# Altium PCB MAGI'sBatteryPowerMega.PcbDoc (part 1 of 2)
Units mil, origin at the board's own origin, x right, y up, seen from the top; angles counter-clockwise.
Board outline 6000 x 4000 mil, 2 copper layers (Top Layer, Bottom Layer); 34 components, 41 nets, 189 pads, 153 vias.
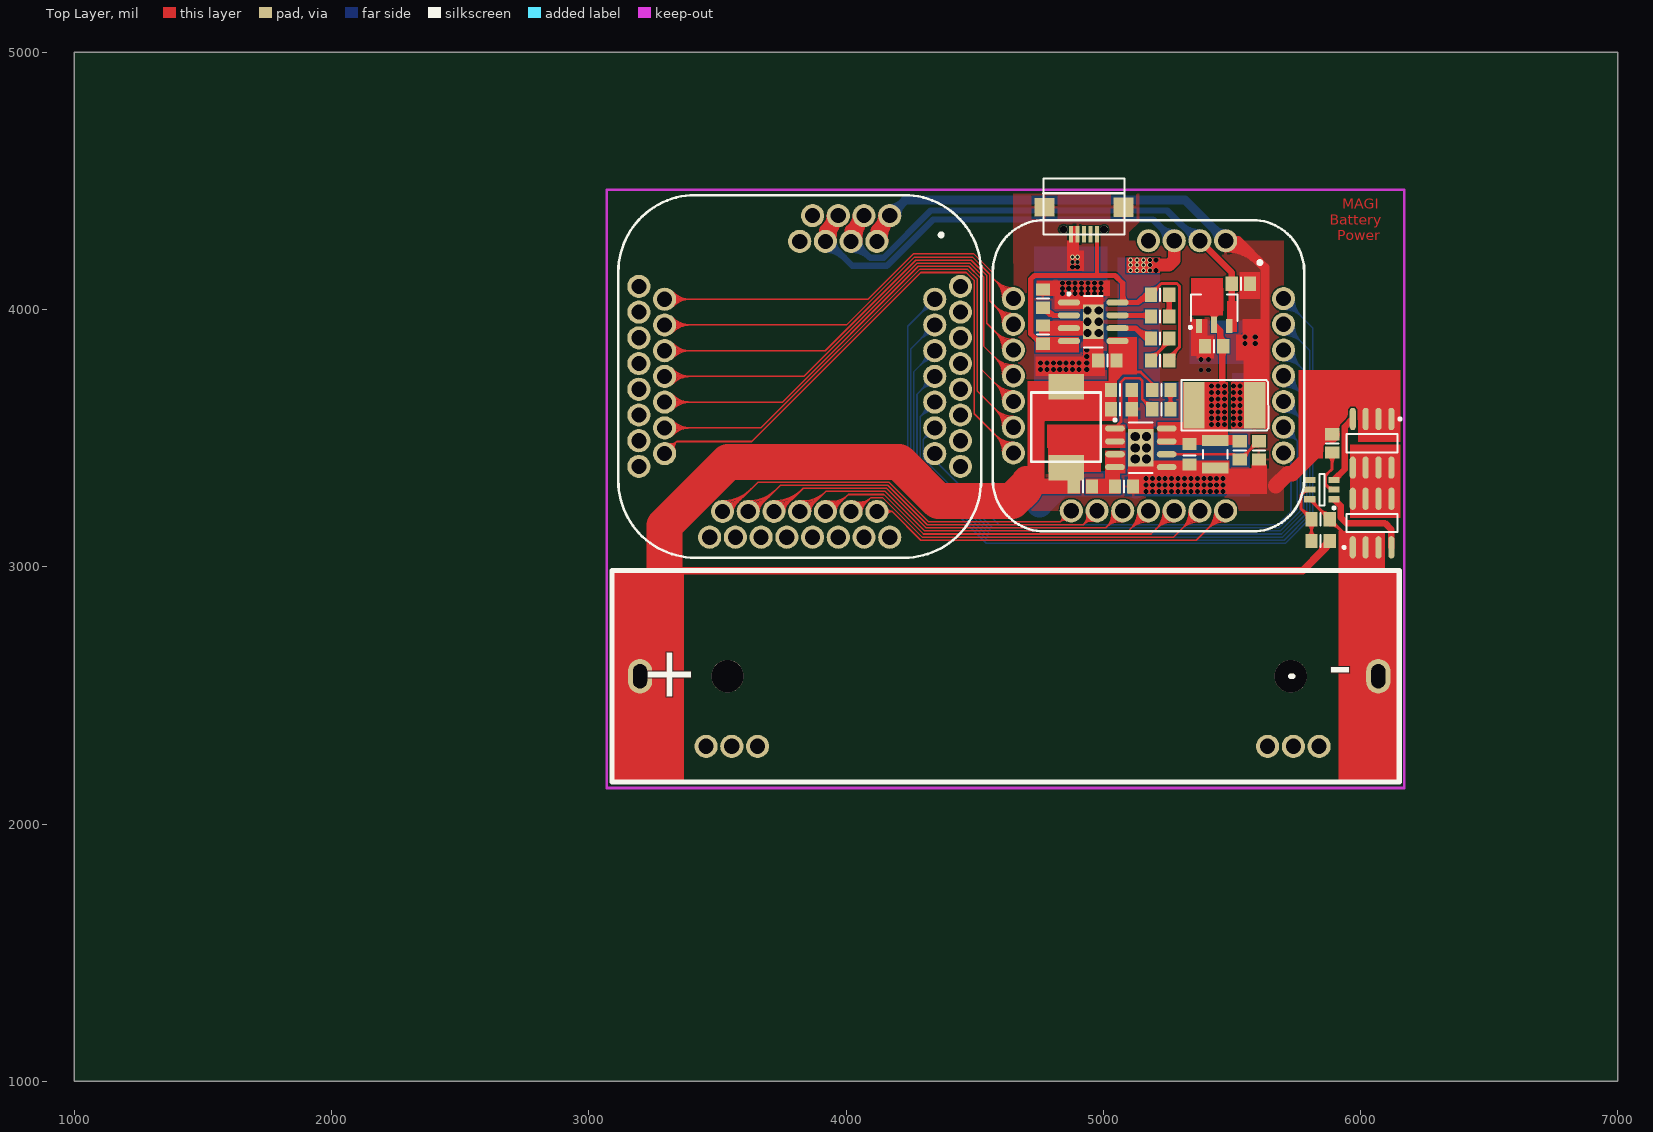
[diagram p0: Top Layer view]
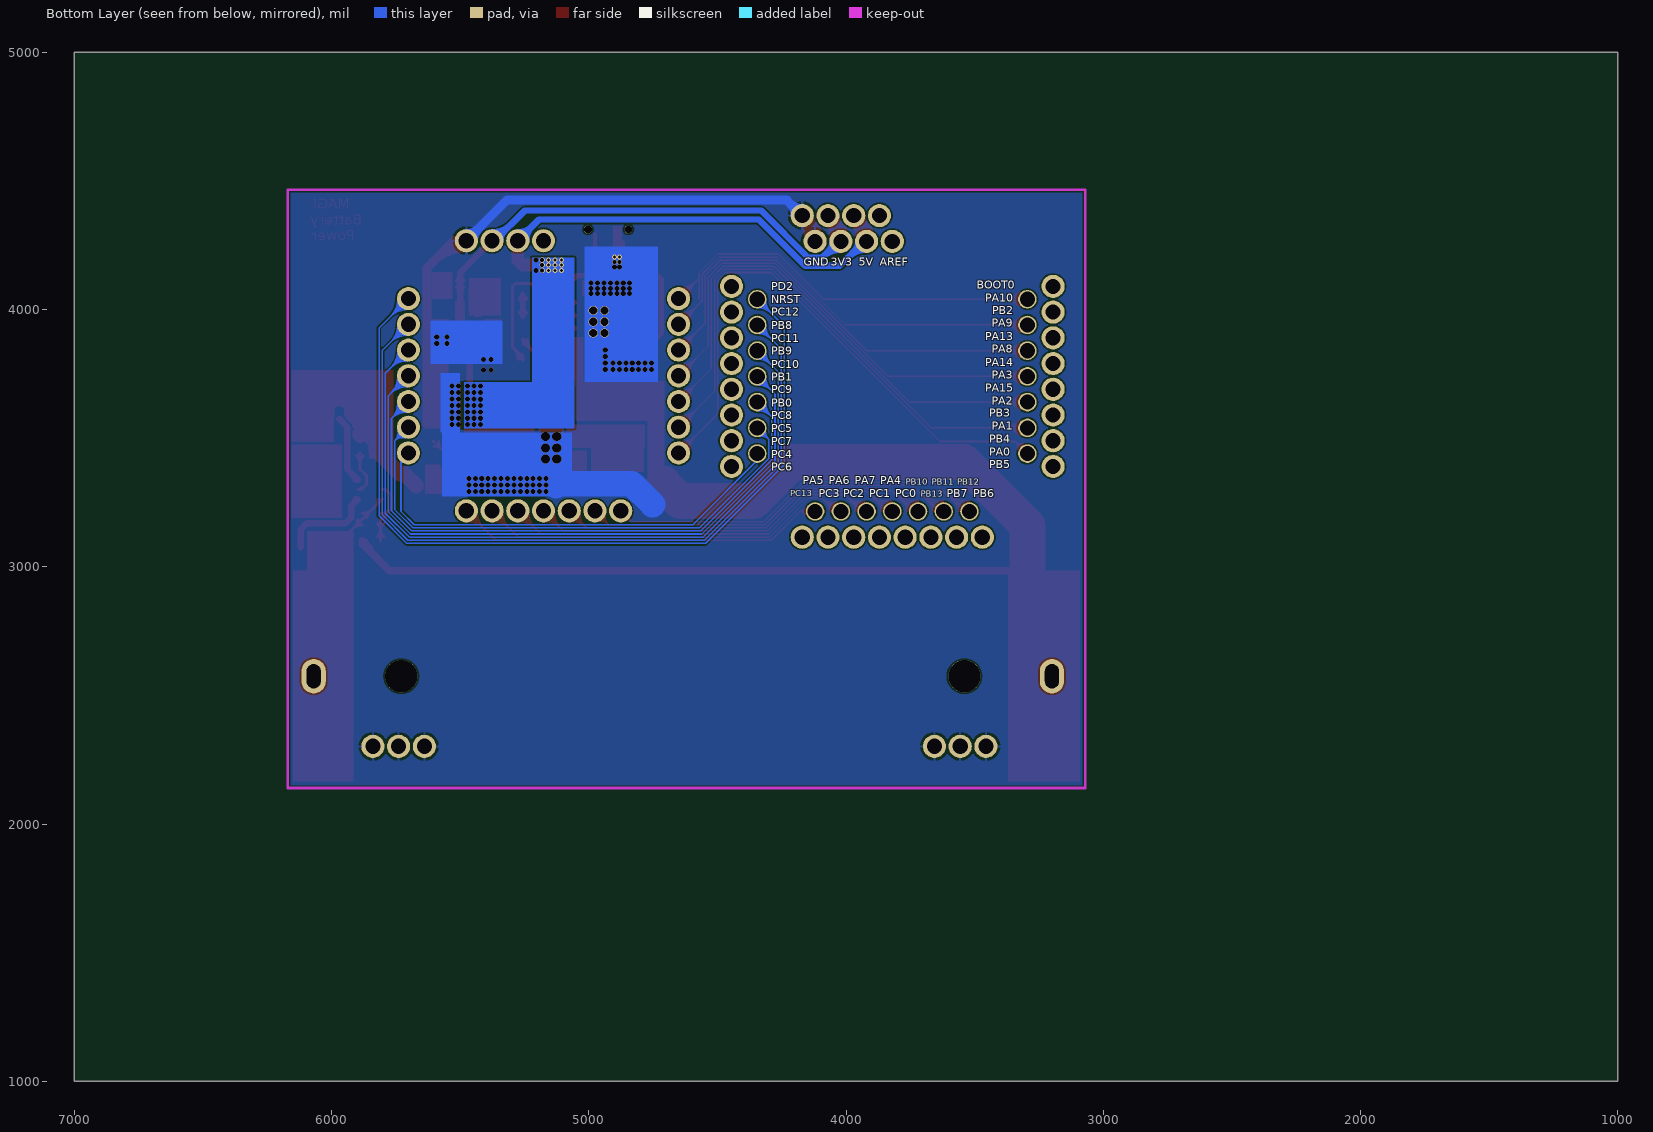
[diagram p1: Bottom Layer view, seen from below]

## Layer stack, top to bottom
Top Solder: solder mask 0.4, Solder Resist, Dk 3.5
Top Layer: signal copper 1.4
Dielectric1: dielectric 12.6, FR-4, Dk 4.8
Bottom Layer: signal copper 1.4
Bottom Solder: solder mask 0.4, Solder Resist, Dk 3.5

## Board outline
1000,1000 7000,1000 7000,5000 1000,5000

## Design rules (kind name [scope] priority, off if disabled: settings)
Clearance [All] p1: gap=6
PolygonConnect [All] p1: connectstyle=Relief reliefconductorwidth=10 reliefentries=4 polygonreliefangle="90 Angle" airgapwidth=10
RoutingVias [All] p1: holewidth=28 width=50 viastyle="Through Hole" minholewidth=28 minwidth=50 maxholewidth=28 maxwidth=50
SolderMaskExpansion [All] p1: expansion=4
Width [All] p1: maxlimit=200 minlimit=6 preferedwidth=30
29 further rules are at their usual default settings.

## Components (designator, comment, footprint, x,y, rotation, side; value= is the part's Value field where it differs from the comment)
C1 "TAN Cap" TAN-D-7343 5470.94,3627.44 r0 top
C2 "22uf" 14-1210 5435.94,3437.44 r270 top
C4 "10uf" 6-0805_N#1 5335.94,3432.44 r270 top
C5 "10uf" 6-0805_N#2 5430.94,3857.44 r180 top
C6 "10uf" 6-0805_N#2 5535,4100 r0 top
C7 "10uf" 6-0805_N#3 5065.94,3612.44 r0 top
C8 "1uf" 6-0805_N#2 5080.94,3312.44 r0 top
C9 "10uf" 6-0805_N#3 5065.94,3687.44 r0 top
C10 "10uf" 6-0805_N#2 4765.94,3902.44 r90 top
C11 "10uf" 6-0805_N#2 5015.94,3802.44 r180 top
C12 "10uf" 6-0805_N#2 5845,3185 r0 top
D1 "LED" 6-0805_N#2 5225.94,3687.44 r0 top
D2 "LED" 6-0805_N#2 5220.94,3972.44 r180 top
D3 "LED" 6-0805_N#2 5220.94,3887.44 r180 top
J1 "MAGI-M8" MAGI-M8 5175.94,3742.44 r0 top
J2 "CON2" 18650 5195,2565 r180 top
J3 "MAGIsBoard-2x" MAGIsBoard-2x 3820,3740 r0 top
L1 "INDUCTOR" 7*7 4845.94,3542.44 r90 top
Q1 "IRF7822" SO-8_N 6045,3170 r90 top
Q2 "IRF7822" SO-8_N 6045,3480 r270 top
R4 "1K" 6-0805_N#2 5225.94,3612.44 r180 top
R5 "316kΩ" 6-0805_N#2 5530.94,3452.44 r270 top
R6 "4.7" 6-0805_N#2 4920.94,3312.44 r0 top
R7 "100kΩ" 6-0805_N#2 5605.94,3452.44 r270 top
R8 "RPROG" 6-0805_N#2 4765.94,4042.44 r270 top
R9 "1K" 6-0805_N#2 5220.94,4057.44 r180 top
R10 "1K" 6-0805_N#2 5220.94,3802.44 r0 top
R12 "000" 6-0805_n 5890,3480 r270 top
R13 "000" 6-0805_n 5845,3100 r0 top
U1 "USB" MicroUSB 4925,4315 r0 top
U2 "HS7333" HS7333 5430.94,4007.44 r90 top
U3 "G5177B" G5177B 5145.94,3462.44 r0 top
U4 "TP4056" TP4056 4960.94,3952.44 r0 top
U6 "DW-01" TPS2513 5850,3300 r180 top

## Footprints (in the part's own frame and the unit in brackets; to place one, negate y for a bottom-side part, rotate by r counter-clockwise, add the part's x,y. Pads: shape width x height; smd on the part's side, far side on the other; paste and mask are expansions set on the pad)
6-0805_N#1 [mm] "Chip Resistor, Body 2.0x1.2mm, IPC Medium Density"
  rect 1.2x1.4 smd: 1(-1.143,0) 2(0.9,0)
  silkscreen extent 0,-0.6 0,0.6, body extent -1.07,-0.7 1.07,0.7, height 0.7
6-0805_N#2 [mm] "Chip Resistor, Body 2.0x1.2mm, IPC Medium Density"
  rect 1.2x1.4 smd: 1(-0.9,0) 2(0.9,0)
  silkscreen extent 0,-0.6 0,0.6, body extent -1.07,-0.7 1.07,0.7, height 0.7
6-0805_N#3 [mm] "Chip Resistor, Body 2.0x1.2mm, IPC Medium Density"
  rect 1.2x1.4 smd: 1(-0.9,0) 2(1.143,0)
  silkscreen extent 0,-0.6 0,0.6, body extent -1.07,-0.7 1.07,0.7, height 0.7
6-0805_n [mm] "Chip Resistor, Body 2.0x1.2mm, IPC Medium Density"
  rect 1.2x1.4 smd: 1(-0.9,0) 2(0.9,0)
  silkscreen extent 0,-0.6 0,0.6, body extent -1.07,-0.7 1.07,0.7, height 0.7
7*7 [mil]
  rect 98.43x137.8 smd: 1(-157.5,-10) 2(157.5,-10)
  silkscreen extent -135,-145 135,125
14-1210 [mm] "Chip Resistor, Body 3.2x2.5mm, IPC High Density"
  rect 1.1x2.6 smd: 1(-1.35,0) 2(1.35,0)
  silkscreen extent -0.4,-1.2 0.4,1.2, body extent -1.68,-1.32 1.68,1.32, height 0.9
18650 [mm]
  round 3.2 hole 3.2: 0(-13.56,-0.24) 0(42.05,-0.24)
  oval 2.4x3.4 hole 1.38 slot 2.4 at 90 deg: 1(50.69,-0.24) 2(-22.21,-0.24)
  silkscreen extent -24.28,-10.69 53.46,10.21
G5177B [mm]
  oval 1.95x0.6 smd: 1(-2.55,1.905) 2(-2.55,0.635) 3(-2.55,-0.635) 4(-2.55,-1.905) 5(2.55,-1.905) 6(2.55,-0.635) 7(2.55,0.635) 8(2.55,1.905)
  rect 2.55x3.71 smd: 9(0,0)
  silkscreen extent -2.67,-2.5 1.17,2.88, body extent -2,-2.5 2,2.5, height 1.65
HS7333 [mm] "SOT89, 3-Leads, Body 4.50x2.50mm, Pitch 1.50mm, Lead Span 4.1mm, IPC Medium Density"
  rect 1.4x0.6 smd: 1(-1.8,1.5) 3(-1.8,-1.5)
  rect 1.6x0.6 smd: 2(-1.7,0)
  Top Layer region: -0.9,0.3 -0.3,0.9 1.9,0.9 2.5,0.3 2.5,-0.3 1.9,-0.9 -0.3,-0.9 -0.9,-0.3
  silkscreen extent -2.07,-2.3 1.3,2.47, body extent -1.3,-2.3 1.3,2.3, height 1.6
MAGI-M8 [mil]
  round 90 hole 59.06: 1(300,525) 2(200,525) 3(100,525) 4(0,525) 8(-525,300) 9(-525,200) 10(-525,100) 11(-525,0) 12(-525,-100) 13(-525,-200) 14(-525,-300) 15(-300,-525) 16(-200,-525) 17(-100,-525) 18(0,-525) 19(100,-525) 20(200,-525) 21(300,-525) 22(525,-300) 23(525,-200) 24(525,-100) 25(525,0) 26(525,100) 27(525,200) 28(525,300)
  silkscreen extent -605,-605 605,430
MAGIsBoard-2x [mil]
  round 90 hole 59.06: 1(300,525) 1(350,625) 2(200,525) 2(250,625) 3(100,525) 3(150,625) 4(0,525) 4(50,625) 29(-625,350) 30(-625,250) 31(-625,150) 32(-625,50) 33(-625,-50) 34(-625,-150) 35(-625,-250) 36(-625,-350) 37(-350,-625) 38(-250,-625) 39(-150,-625) 40(-50,-625) 41(50,-625) 42(150,-625) 43(250,-625) 44(350,-625) 45(625,-350) 46(625,-250) 47(625,-150) 48(625,-50) 49(625,50) 50(625,150) 51(625,250) 52(625,350)
  round 90 / inner round 72 / far side round 72 hole 59.06: 8(-525,300) 9(-525,200) 10(-525,100) 11(-525,0) 12(-525,-100) 13(-525,-200) 14(-525,-300) 15(-300,-525) 16(-200,-525) 17(-100,-525) 18(0,-525) 19(100,-525) 20(200,-525) 21(300,-525) 22(525,-300) 23(525,-200) 24(525,-100) 25(525,0) 26(525,100) 27(525,200) 28(525,300)
  silkscreen extent -705,-705 705,705
MicroUSB [mm]
  round 0.8 hole 0.8: 0(-2,-0.1) 0(2,-0.1)
  rect 0.4x1.6 smd: 1(1.3,-0.576) 2(0.65,-0.576) 3(0,-0.576) 4(-0.65,-0.576) 5(-1.3,-0.576)
  rect 2x1.8 smd: 6(-3.9,2.1)
  rect 2x1.9 smd: 7(3.9,2.1)
  silkscreen extent -4,-0.58 4,4.92, body extent -4.1,-0.68 4.1,5.02, height 3
SO-8_N [mm] "SOIC, 8-Leads, Body 4.9x3.9mm, Pitch 1.27mm, IPC Medium Density"
  oval 2.2x0.6 smd: 1(-2.4,1.905) 2(-2.4,0.635) 3(-2.4,-0.635) 4(-2.4,-1.905) 5(2.4,-1.905) 6(2.4,-0.635) 7(2.4,0.635) 8(2.4,1.905)
  silkscreen extent -2.52,-2.5 0.9,2.88, body extent -2,-2.5 2,2.5, height 1.75
TAN-D-7343 [mm]
  rect 2.1x4.6 smd: 1(-3,0) 2(3,0)
  silkscreen extent -4.25,-2.5 4.34,2.5, body extent -3.65,-2.15 3.65,2.15, height 2.9
TP4056 [mm] "SOIC, 8-Leads, Body 4.90x3.90mm, Pitch 1.27mm, Thermal Pad 3.40.2x2.00.2mm, IPC Medium Density"
  oval 2.2x0.6 smd: 1(-2.4,1.905) 2(-2.4,0.635) 3(-2.4,-0.635) 4(-2.4,-1.905) 5(2.4,-1.905) 6(2.4,-0.635) 7(2.4,0.635) 8(2.4,1.905)
  rect 2x3.4 smd: 9(0,0)
  silkscreen extent -2.52,-2.55 0.9,2.88, body extent -2,-2.55 2,2.55, height 1.75
TPS2513 [mm]
  rect 1.1x0.6 smd: 1(-1.2,0.95) 2(-1.2,0) 3(-1.2,-0.95) 4(1.2,-0.95) 5(1.2,0) 6(1.2,0.95)
  silkscreen extent -1.33,-1.55 0.25,1.92, body extent -0.87,-1.52 0.87,1.53, height 1.45

## Part data
C1 C2 C4 C5 C6 C7 C8 C9 C10 C11 C12: library part "CAPACITOR POL", "Capacitor"
J2: "Connector"
Q1 Q2: "HEXFET Power MOSFET"
R4 R5 R6 R7 R8 R9 R10 R12 R13: library part RES1
U6: library part TPS2513

## Free pads (board coordinates)
  round 90 hole 59.06: 1(3456.1,2301.9) 2(3456.1,2301.9) 2(5639.06,2301.9) 3(3556.1,2301.9) 3(5739.06,2301.9) 4(3656.1,2301.9) 4(5839.06,2301.9)

## Via types
v1: diameter 19.68, hole 19.68, Top Layer to Bottom Layer, 125 vias
v2: diameter 19.68, hole 11.81, Top Layer to Bottom Layer, 11 vias
v3: diameter 35.43, hole 31.5, Top Layer to Bottom Layer, 6 vias
v4: diameter 35.43, hole 35.43, Top Layer to Bottom Layer, 6 vias
v5: diameter 19.68, hole 15.75, Top Layer to Bottom Layer, 5 vias

## Nets (pads, with @x,y where several pads share a name; then routed paths per layer and width w, separated by ;. In a path a pad name is that pad's centre, name@x,y a point inside that pad or via, vN(x,y) a via of type N, cw(c..) or ccw(c..) an arc to the next point about the centre after c; other vN are vias at no path point)
3.3V: C6.1 J1.2 J3.2 U2.3 | length 2482.6
  Top Layer w25: J1.2@5375.94,4267.44 5499.57,4143.82 C6.1@5499.57,4100 5499.57,4000.43 5505,3995 ; C6.1@5491.7,4088.2 cw(c5472.72,4069.21) 5499.57,4069.21 cw(c5526.42,4069.21) C6.1@5507.43,4088.2 ; C6.1@5491.7,4111.8 ccw(c5472.72,4130.79) 5499.57,4130.79 ccw(c5526.42,4130.79) C6.1@5507.43,4111.8
  Top Layer w50: J3.2@4020,4265 4020,4307.52 J3.2@4070,4357.52 ; 4030.57,4318.09 ccw(c3983.66,4365) J3.2@4050,4365 ; J3.2@4039.81,4267.73 cw(c4145.27,4282.25) J3.2@4070,4357.52 ; 4044.58,4313.5 ccw(c3991.71,4344.02) J3.2@4050.68,4359.82 ; J3.2@4070,4365 J3.2@4070,4357.52
  Bottom Layer w25: J3.2@4020,4232.5 cw(c4020,4129.42) 4092.89,4202.31 ; J3.2@4020,4265 4030.2,4265 4093.7,4201.5 4146.3,4201.5 4329.8,4385 5248.19,4385 5365.75,4267.44 J1.2@5375.94,4267.44 ; J3.2@4052.5,4265 ccw(c4106.34,4265) 4068.27,4226.93 ; 5303.06,4330.13 ccw(c5375.94,4403.02) J1.2@5375.94,4299.94 ; 5327.67,4305.51 cw(c5289.6,4267.44) J1.2@5343.44,4267.44
5V: C1.1 C2.1 C4.1 C5.1 J1.3 J3.3 R5.1 U2.2 U3.7 U3.8 | length 3837.2
  Top Layer w12: v1@5419.02,3654.58 ccw(c5408.05,3673.59) 5429.25,3667.91 ; 5420.94,3637.44 5420.94,3665.07 ; v1@5424.27,3675.52 cw(c5443.28,3664.55) 5437.6,3685.75 ; v1@5428.45,3671.1 ccw(c5425.24,3692.81) v1@5442.86,3679.73 ; 5430.95,3666.42 ccw(c5421.74,3686.35) v1@5442.34,3678.77 ; 5435.16,3687.27 cw(c5455.23,3678.38) v1@5447.33,3698.86 ; 5437.64,3685.79 cw(c5458.84,3680.11) v1@5447.87,3699.11 ; v1@5437.88,3678.65 cw(c5450.24,3676.8) 5443.99,3687.62 ; v1@5440.05,3684.93 ccw(c5433.43,3694.02) v1@5442.76,3700.3 ; 5442.83,3686.95 cw(c5470.94,3658.84) v1@5470.94,3698.6 ; v1@5449.74,3676.87 cw(c5481.71,3672.08) v1@5465.55,3700.07 ; v1@5449.77,3677.76 cw(c5481.89,3680.44) 5459.1,3703.23 5420.94,3665.07 ; 5450.12,3692.26 ccw(c5443.77,3700.98) v1@5452.71,3706.99 ; 5420.95,3665.07 cw(c5442.08,3643.94) 5445.5,3673.62 ccw(c5442.08,3643.94) 5420.95,3665.07 ; v1@5420.94,3681.28 ccw(c5420.94,3720.43) 5448.63,3692.75 cw(c5420.94,3720.43) v1@5420.94,3681.28 ; v1@5420.94,3681.28 ccw(c5420.94,3697.56) 5432.45,3686.05 cw(c5420.94,3697.56) v1@5420.94,3681.28 ; v1@5424.79,3651.25 cw(c5467.41,3651.25) 5437.27,3681.4 ccw(c5467.41,3651.25) v1@5424.79,3651.25 ; v1@5424.79,3651.25 cw(c5443.08,3651.25) 5430.14,3664.19 ccw(c5443.08,3651.25) v1@5424.79,3651.25 ; v1@5412.79,3651.25 cw(c5426.44,3651.25) 5416.79,3660.91 ccw(c5426.44,3651.25) v1@5412.79,3651.25 ; v1@5416.88,3670.37 ccw(c5422.48,3680.12) 5431.6,3673.54 cw(c5422.48,3680.12) v1@5416.88,3670.37 ; v1@5420.35,3681.24 ccw(c5415.29,3713.51) 5443.58,3697.17 cw(c5415.29,3713.51) v1@5420.35,3681.24 ; v1@5422.21,3669.38 ccw(c5420.29,3681.63) 5431.02,3675.43 cw(c5420.29,3681.63) v1@5422.21,3669.38 ; v1@5422.86,3680.77 ccw(c5429.15,3691.73) 5439.39,3684.33 cw(c5429.15,3691.73) v1@5422.86,3680.77 ; v1@5423.5,3657.54 cw(c5452.24,3640.95) 5446.6,3673.65 ccw(c5452.24,3640.95) v1@5423.5,3657.54 ; v1@5426.21,3679.81 ccw(c5409.88,3708.1) 5442.15,3703.04 cw(c5409.88,3708.1) v1@5426.21,3679.81 ; v1@5428.63,3672.02 cw(c5437.31,3665.65) 5443.68,3674.34 ccw(c5437.31,3665.65) v1@5428.63,3672.02 ; 5430.64,3674.76 ccw(c5402.96,3702.44) 5442.1,3702.44 cw(c5402.96,3702.44) 5430.64,3674.76 ; 5435.72,3681.7 cw(c5444.4,3675.34) 5450.76,3684.02 ccw(c5444.4,3675.34) 5435.72,3681.7 ; 5436.31,3679.73 cw(c5446.57,3673.8) 5444.56,3685.48 ccw(c5446.57,3673.8) 5436.31,3679.73 ; v1@5439.36,3672.62 cw(c5448.05,3678.98) 5441.69,3687.66 ccw(c5448.05,3678.98) v1@5439.36,3672.62 ; 5447.96,3692.36 ccw(c5441.76,3703.1) 5454,3701.18 cw(c5441.76,3703.1) 5447.96,3692.36 ; v1@5449.05,3679.71 cw(c5457.73,3686.07) 5451.37,3694.76 ccw(c5457.73,3686.07) v1@5449.05,3679.71
  Top Layer w25: U2.2@5430.94,3940.51 5455.69,3915.77 5455.69,3889.01 ; v1@5445.63,3705.08 cw(c5448.2,3683.76) v1@5463.39,3698.94 ; v1@5445.79,3705.09 cw(c5447.16,3680.91) 5464.29,3698.04 v1@5463.39,3698.94 ; 5463.39,3714.27 ccw(c5482.78,3714.27) v1@5469.07,3700.56 ; 5455.69,3889.01 ccw(c5472.97,3889.01) 5468.96,3872.2 cw(c5472.97,3889.01) 5455.69,3889.01 ; 5455.69,3889.01 cw(c5444.15,3877.47) 5457.37,3867.9 ccw(c5444.15,3877.47) 5455.69,3889.01 ; 5455.69,3889.01 5466.38,3878.32 C5.1@5466.38,3857.44 5463.39,3854.45 v1@5463.39,3698.94 ; 5463.39,3819.43 cw(c5500.45,3819.43) 5474.24,3845.64 ccw(c5500.45,3819.43) 5463.39,3819.43 ; v1@5465.62,3696.71 cw(c5446.35,3677.44) 5473.6,3677.44 ccw(c5446.35,3677.44) v1@5465.62,3696.71
  Top Layer w50: J3.3@3920,4265 3920,4307.52 J3.3@3970,4357.52 ; 3930.57,4318.09 ccw(c3883.66,4365) J3.3@3950,4365 ; J3.3@3939.81,4267.73 cw(c4045.27,4282.25) J3.3@3970,4357.52 ; 3944.58,4313.5 ccw(c3891.71,4344.02) J3.3@3950.68,4359.82 ; J3.3@3970,4365 J3.3@3970,4357.52 ; v5(5180.94,4172.44) 5255.94,4172.44 5275.94,4192.44 J1.3@5275.94,4267.44
  Bottom Layer w25: J3.3@3920,4232.5 cw(c3920,4129.42) 3992.89,4202.31 ; J3.3@3920,4265 3930.2,4265 4024.7,4170.5 4159.14,4170.5 4338.64,4350 5193.39,4350 J1.3@5275.94,4267.44 ; J3.3@3952.5,4265 ccw(c4006.34,4265) 3968.27,4226.93 ; J1.3@5243.44,4267.44 ccw(c5164.98,4267.44) 5220.46,4322.92 ccw(c5275.94,4378.4) J1.3@5275.94,4299.94
  other v1: 5420.94,3552.44 5445.94,3552.44 5470.94,3552.44 5420.94,3577.44 5445.94,3577.44 5470.94,3577.44 5420.94,3602.44 5445.94,3602.44 5470.94,3602.44 5420.94,3627.44 5445.94,3627.44 5470.94,3627.44 5420.94,3651.25 5445.94,3652.44 5470.94,3652.44 5420.94,3677.44 5445.94,3677.44 5470.94,3677.44 5420.94,3702.44 5445.94,3702.44 5470.94,3702.44 5205.94,4152.44 5205.94,4192.44
  other v2: 5105.94,4152.44 5130.94,4152.44 5155.94,4152.44 5105.94,4172.44 5130.94,4172.44 5155.94,4172.44 5105.94,4192.44 5130.94,4192.44 5155.94,4192.44
  other v5: 5180.94,4152.44 5180.94,4192.44
A0: J1.22 J3.22 | length 1775.8
  Bottom Layer w6: J3.22@4345,3440 4345,3413.63 4595.19,3163.44 5678.44,3163.44 5730,3215 5730,3413.39 J1.22@5700.94,3442.44
A1: J1.23 J3.23 | length 2536.6
  Bottom Layer w6: J3.23@4312.48,3534.37 cw(c4268.28,3526.72) 4300,3495 ; J3.23@4318.4,3535.4 cw(c4282.23,3529.14) 4308.18,3503.18 cw(c4334.14,3477.23) J3.23@4340.4,3513.4 ; J3.23@4324.31,3536.42 cw(c4296.18,3531.55) 4316.37,3511.37 cw(c4336.55,3491.18) J3.23@4341.42,3519.31 ; J3.23@4339.37,3507.48 ccw(c4331.72,3463.28) 4300,3495 ; J3.23@4345,3540 4300,3495 ; J1.23@5700.94,3542.44 5754.94,3488.44 ; J1.23@5707.5,3513.17 cw(c5715.06,3479.41) 5739.51,3503.87 cw(c5763.97,3528.33) J1.23@5730.22,3535.89 ; J1.23@5708.81,3507.31 cw(c5717.88,3466.81) 5747.23,3496.16 cw(c5776.58,3525.51) J1.23@5736.08,3534.58 ; J1.23@5710.12,3501.46 cw(c5720.7,3454.2) 5754.94,3488.44 ; J1.23@5741.93,3533.26 ccw(c5789.18,3522.68) 5754.94,3488.44 ; 4300,3495 4300,3421.36 4569.92,3151.44 5683.41,3151.44 5754.94,3222.97 5754.94,3488.44
A2: J1.24 J3.24 | length 3128.9
  Bottom Layer w6: J3.24@4312,3640 cw(c4232.33,3640) 4288.67,3583.67 cw(c4345,3527.33) J3.24@4345,3607 ; J3.24@4318,3640 cw(c4252.82,3640) 4298.91,3593.91 cw(c4345,3547.82) J3.24@4345,3613 ; J3.24@4324,3640 cw(c4273.3,3640) 4309.15,3604.15 cw(c4345,3568.3) J3.24@4345,3619 ; J3.24@4330,3640 cw(c4293.79,3640) 4319.39,3614.39 cw(c4345,3588.79) J3.24@4345,3625 ; J3.24@4345,3640 4288,3583 4288,3416.39 4564.95,3139.44 5688.38,3139.44 5766.94,3218 5766.94,3576.44 ; J1.24@5700.94,3642.44 5766.94,3576.44 ; J1.24@5702.39,3618.48 cw(c5705.24,3571.31) 5738.66,3604.73 cw(c5772.08,3638.15) J1.24@5724.9,3640.99 ; J1.24@5702.75,3612.5 cw(c5706.31,3553.53) 5748.09,3595.3 cw(c5789.86,3637.07) J1.24@5730.89,3640.63 ; J1.24@5703.11,3606.51 cw(c5707.39,3535.74) 5757.51,3585.87 cw(c5807.64,3636) J1.24@5736.88,3640.27 ; J1.24@5703.48,3600.52 cw(c5708.46,3517.96) 5766.94,3576.44 ; J1.24@5742.87,3639.91 ccw(c5825.42,3634.93) 5766.94,3576.44
A3: J1.25 J3.25 | length 3439.5
  Bottom Layer w6: J3.25@4312,3740 cw(c4232.33,3740) 4288.67,3683.67 cw(c4345,3627.33) J3.25@4345,3707 ; J3.25@4318,3740 cw(c4252.82,3740) 4298.91,3693.91 cw(c4345,3647.82) J3.25@4345,3713 ; J3.25@4324,3740 cw(c4273.3,3740) 4309.15,3704.15 cw(c4345,3668.3) J3.25@4345,3719 ; J3.25@4330,3740 cw(c4293.79,3740) 4319.39,3714.39 cw(c4345,3688.79) J3.25@4345,3725 ; J3.25@4345,3740 4276,3671 4276,3411.42 4559.98,3127.44 5693.35,3127.44 5778.94,3213.03 5778.94,3664.44 J1.25@5700.94,3742.44 ; J1.25@5700.94,3700.44 cw(c5700.94,3599.04) 5772.64,3670.74 cw(c5844.34,3742.44) J1.25@5742.94,3742.44 ; J1.25@5700.94,3706.44 cw(c5700.94,3619.53) 5762.4,3680.99 cw(c5823.86,3742.44) J1.25@5736.94,3742.44 ; J1.25@5700.94,3712.44 cw(c5700.94,3640.01) 5752.16,3691.23 cw(c5803.37,3742.44) J1.25@5730.94,3742.44 ; J1.25@5700.94,3718.44 cw(c5700.94,3660.5) 5741.92,3701.47 cw(c5782.89,3742.44) J1.25@5724.94,3742.44
A4: J1.26 J3.26 | length 3689.2
  Bottom Layer w6: J3.26@4312,3840 cw(c4232.33,3840) 4288.67,3783.67 cw(c4345,3727.33) J3.26@4345,3807 ; J3.26@4318,3840 cw(c4252.82,3840) 4298.91,3793.91 cw(c4345,3747.82) J3.26@4345,3813 ; J3.26@4324,3840 cw(c4273.3,3840) 4309.15,3804.15 cw(c4345,3768.3) J3.26@4345,3819 ; J3.26@4330,3840 cw(c4293.79,3840) 4319.39,3814.39 cw(c4345,3788.79) J3.26@4345,3825 ; J3.26@4345,3840 4264,3759 4264,3406.45 4555.01,3115.44 5698.32,3115.44 5790.94,3208.06 5790.94,3752.44 J1.26@5700.94,3842.44 ; J1.26@5700.94,3800.44 cw(c5700.94,3699.04) 5772.64,3770.74 cw(c5844.34,3842.44) J1.26@5742.94,3842.44 ; J1.26@5700.94,3806.44 cw(c5700.94,3719.53) 5762.4,3780.99 cw(c5823.86,3842.44) J1.26@5736.94,3842.44 ; J1.26@5700.94,3812.44 cw(c5700.94,3740.01) 5752.16,3791.23 cw(c5803.37,3842.44) J1.26@5730.94,3842.44 ; J1.26@5700.94,3818.44 cw(c5700.94,3760.5) 5741.92,3801.47 cw(c5782.89,3842.44) J1.26@5724.94,3842.44
A5: J1.27 J3.27 | length 3938.9
  Bottom Layer w6: J3.27@4312,3940 cw(c4232.33,3940) 4288.67,3883.67 cw(c4345,3827.33) J3.27@4345,3907 ; J3.27@4318,3940 cw(c4252.82,3940) 4298.91,3893.91 cw(c4345,3847.82) J3.27@4345,3913 ; J3.27@4324,3940 cw(c4273.3,3940) 4309.15,3904.15 cw(c4345,3868.3) J3.27@4345,3919 ; J3.27@4330,3940 cw(c4293.79,3940) 4319.39,3914.39 cw(c4345,3888.79) J3.27@4345,3925 ; J3.27@4345,3940 4252,3847 4252,3401.48 4550.04,3103.44 5703.29,3103.44 5802.94,3203.09 5802.94,3840.44 J1.27@5700.94,3942.44 ; J1.27@5700.94,3900.44 cw(c5700.94,3799.04) 5772.64,3870.74 cw(c5844.34,3942.44) J1.27@5742.94,3942.44 ; J1.27@5700.94,3906.44 cw(c5700.94,3819.53) 5762.4,3880.99 cw(c5823.86,3942.44) J1.27@5736.94,3942.44 ; J1.27@5700.94,3912.44 cw(c5700.94,3840.01) 5752.16,3891.23 cw(c5803.37,3942.44) J1.27@5730.94,3942.44 ; J1.27@5700.94,3918.44 cw(c5700.94,3860.5) 5741.92,3901.47 cw(c5782.89,3942.44) J1.27@5724.94,3942.44
BAT: C7.1 C9.1 C11.1 D1.1 J2.1 L1.2 R6.1 R13.2 U4.5 | length 5332.1
  Top Layer w10: C9.1@5030.51,3687.44 5049.13,3706.06 5049.13,3726.31 5075.27,3752.44 ; 5145.44,3757.44 5190.51,3712.37 D1.1@5190.51,3687.44
  Top Layer w12: 5090.94,3757.44 5145.44,3757.44
  Top Layer w30: 3295,2985 5775.45,2985 5854.19,3063.74 5854.19,3073.76 R13.2@5880.43,3100 ; R13.2@5858.99,3078.56 cw(c5880.43,3057.12) R13.2@5880.43,3087.44 ; 5861.42,3070.97 ccw(c5836.33,3096.06) 5871.81,3096.06 cw(c5836.33,3096.06) 5861.42,3070.97
  Top Layer w50: 4705.94,3342.44 4745.94,3382.44 4745.94,3571.94 4750.94,3576.94 4750.94,3692.44
  Top Layer w100: 4694.44,3304.44 4694.44,3337.44 4699.44,3342.44 4705.94,3342.44
  Top Layer w140: 3295,2775 3295,2985 3295,3161.12 3541.88,3408 4205.88,3408 4358.88,3255 4645,3255 4694.44,3304.44
D0: J1.8 J3.8 | length 2596.5
  Top Layer w6: J3.8@3295,4040 4085.18,4040 4261.18,4216 4497.19,4216 4571,4142.19 4571,4122.39 ; J3.8@3311.97,4023.03 cw(c3352.94,3982.06) 3352.94,4040 cw(c3352.94,4097.94) J3.8@3311.97,4056.97 ; J3.8@3316.21,4018.79 cw(c3367.43,3967.57) 3367.43,4040 cw(c3367.43,4112.43) J3.8@3316.21,4061.21 ; J3.8@3320.46,4014.54 cw(c3381.91,3953.09) 3381.91,4040 cw(c3381.91,4126.91) J3.8@3320.46,4065.46 ; J3.8@3324.7,4010.3 cw(c3396.4,3938.6) 3396.4,4040 cw(c3396.4,4141.4) J3.8@3324.7,4069.7 ; 4571,4039.36 4571,4122.39 ; J1.8@4608.94,4042.44 ccw(c4507.55,4042.44) 4579.25,4114.14 ccw(c4650.94,4185.84) J1.8@4650.94,4084.44 ; J1.8@4614.94,4042.44 ccw(c4528.03,4042.44) 4589.49,4103.9 ccw(c4650.94,4165.35) J1.8@4650.94,4078.44 ; J1.8@4620.94,4042.44 ccw(c4548.52,4042.44) 4599.73,4093.65 ccw(c4650.94,4144.87) J1.8@4650.94,4072.44 ; J1.8@4626.94,4042.44 ccw(c4569,4042.44) 4609.97,4083.41 ccw(c4650.94,4124.38) J1.8@4650.94,4066.44 ; J1.8@4650.94,4042.44 4571,4122.39
D1: J1.9 J3.9 | length 2635
  Top Layer w6: J3.9@3295,3940 4002.15,3940 4266.15,4204 4492.22,4204 4559,4137.22 4559,4034.39 J1.9@4650.94,3942.44 ; J3.9@3311.97,3923.03 cw(c3352.94,3882.06) 3352.94,3940 cw(c3352.94,3997.94) J3.9@3311.97,3956.97 ; J3.9@3316.21,3918.79 cw(c3367.43,3867.57) 3367.43,3940 cw(c3367.43,4012.43) J3.9@3316.21,3961.21 ; J3.9@3320.46,3914.54 cw(c3381.91,3853.09) 3381.91,3940 cw(c3381.91,4026.91) J3.9@3320.46,3965.46 ; J3.9@3324.7,3910.3 cw(c3396.4,3838.6) 3396.4,3940 cw(c3396.4,4041.4) J3.9@3324.7,3969.7 ; J1.9@4608.94,3942.44 ccw(c4507.55,3942.44) 4579.25,4014.14 ccw(c4650.94,4085.84) J1.9@4650.94,3984.44 ; J1.9@4614.94,3942.44 ccw(c4528.03,3942.44) 4589.49,4003.9 ccw(c4650.94,4065.35) J1.9@4650.94,3978.44 ; J1.9@4620.94,3942.44 ccw(c4548.52,3942.44) 4599.73,3993.65 ccw(c4650.94,4044.87) J1.9@4650.94,3972.44 ; J1.9@4626.94,3942.44 ccw(c4569,3942.44) 4609.97,3983.41 ccw(c4650.94,4024.38) J1.9@4650.94,3966.44
D2: J1.10 J3.10 | length 2756.6
  Top Layer w6: J3.10@3295,3840 3919.12,3840 4271.12,4192 4487.25,4192 4547,4132.25 4547,3946.39 J1.10@4650.94,3842.44 ; J3.10@3311.97,3823.03 cw(c3352.94,3782.06) 3352.94,3840 cw(c3352.94,3897.94) J3.10@3311.97,3856.97 ; J3.10@3316.21,3818.79 cw(c3367.43,3767.57) 3367.43,3840 cw(c3367.43,3912.43) J3.10@3316.21,3861.21 ; J3.10@3320.46,3814.54 cw(c3381.91,3753.09) 3381.91,3840 cw(c3381.91,3926.91) J3.10@3320.46,3865.46 ; J3.10@3324.7,3810.3 cw(c3396.4,3738.6) 3396.4,3840 cw(c3396.4,3941.4) J3.10@3324.7,3869.7 ; J1.10@4608.94,3842.44 ccw(c4507.55,3842.44) 4579.25,3914.14 ccw(c4650.94,3985.84) J1.10@4650.94,3884.44 ; J1.10@4614.94,3842.44 ccw(c4528.03,3842.44) 4589.49,3903.9 ccw(c4650.94,3965.35) J1.10@4650.94,3878.44 ; J1.10@4620.94,3842.44 ccw(c4548.52,3842.44) 4599.73,3893.65 ccw(c4650.94,3944.87) J1.10@4650.94,3872.44 ; J1.10@4626.94,3842.44 ccw(c4569,3842.44) 4609.97,3883.41 ccw(c4650.94,3924.38) J1.10@4650.94,3866.44
D3: J1.11 J3.11 | length 2878.1
  Top Layer w6: J3.11@3295,3740 3836.09,3740 4276.09,4180 4482.28,4180 4535,4127.28 4535,3858.39 J1.11@4650.94,3742.44 ; J3.11@3311.97,3723.03 cw(c3352.94,3682.06) 3352.94,3740 cw(c3352.94,3797.94) J3.11@3311.97,3756.97 ; J3.11@3316.21,3718.79 cw(c3367.43,3667.57) 3367.43,3740 cw(c3367.43,3812.43) J3.11@3316.21,3761.21 ; J3.11@3320.46,3714.54 cw(c3381.91,3653.09) 3381.91,3740 cw(c3381.91,3826.91) J3.11@3320.46,3765.46 ; J3.11@3324.7,3710.3 cw(c3396.4,3638.6) 3396.4,3740 cw(c3396.4,3841.4) J3.11@3324.7,3769.7 ; J1.11@4608.94,3742.44 ccw(c4507.55,3742.44) 4579.25,3814.14 ccw(c4650.94,3885.84) J1.11@4650.94,3784.44 ; J1.11@4614.94,3742.44 ccw(c4528.03,3742.44) 4589.49,3803.9 ccw(c4650.94,3865.35) J1.11@4650.94,3778.44 ; J1.11@4620.94,3742.44 ccw(c4548.52,3742.44) 4599.73,3793.65 ccw(c4650.94,3844.87) J1.11@4650.94,3772.44 ; J1.11@4626.94,3742.44 ccw(c4569,3742.44) 4609.97,3783.41 ccw(c4650.94,3824.38) J1.11@4650.94,3766.44
D4: J1.12 J3.12 | length 2999.6
  Top Layer w6: J3.12@3295,3640 3753.06,3640 4281.06,4168 4477.31,4168 4523,4122.31 4523,3770.39 J1.12@4650.94,3642.44 ; J3.12@3311.97,3623.03 cw(c3352.94,3582.06) 3352.94,3640 cw(c3352.94,3697.94) J3.12@3311.97,3656.97 ; J3.12@3316.21,3618.79 cw(c3367.43,3567.57) 3367.43,3640 cw(c3367.43,3712.43) J3.12@3316.21,3661.21 ; J3.12@3320.46,3614.54 cw(c3381.91,3553.09) 3381.91,3640 cw(c3381.91,3726.91) J3.12@3320.46,3665.46 ; J3.12@3324.7,3610.3 cw(c3396.4,3538.6) 3396.4,3640 cw(c3396.4,3741.4) J3.12@3324.7,3669.7 ; J1.12@4608.94,3642.44 ccw(c4507.55,3642.44) 4579.25,3714.14 ccw(c4650.94,3785.84) J1.12@4650.94,3684.44 ; J1.12@4614.94,3642.44 ccw(c4528.03,3642.44) 4589.49,3703.9 ccw(c4650.94,3765.35) J1.12@4650.94,3678.44 ; J1.12@4620.94,3642.44 ccw(c4548.52,3642.44) 4599.73,3693.65 ccw(c4650.94,3744.87) J1.12@4650.94,3672.44 ; J1.12@4626.94,3642.44 ccw(c4569,3642.44) 4609.97,3683.41 ccw(c4650.94,3724.38) J1.12@4650.94,3666.44
D5: J1.13 J3.13 | length 3121.2
  Top Layer w6: J3.13@3295,3540 3670.03,3540 4286.03,4156 4472.34,4156 4511,4117.34 4511,3682.39 J1.13@4650.94,3542.44 ; J3.13@3311.97,3523.03 cw(c3352.94,3482.06) 3352.94,3540 cw(c3352.94,3597.94) J3.13@3311.97,3556.97 ; J3.13@3316.21,3518.79 cw(c3367.43,3467.57) 3367.43,3540 cw(c3367.43,3612.43) J3.13@3316.21,3561.21 ; J3.13@3320.46,3514.54 cw(c3381.91,3453.09) 3381.91,3540 cw(c3381.91,3626.91) J3.13@3320.46,3565.46 ; J3.13@3324.7,3510.3 cw(c3396.4,3438.6) 3396.4,3540 cw(c3396.4,3641.4) J3.13@3324.7,3569.7 ; J1.13@4608.94,3542.44 ccw(c4507.55,3542.44) 4579.25,3614.14 ccw(c4650.94,3685.84) J1.13@4650.94,3584.44 ; J1.13@4614.94,3542.44 ccw(c4528.03,3542.44) 4589.49,3603.9 ccw(c4650.94,3665.35) J1.13@4650.94,3578.44 ; J1.13@4620.94,3542.44 ccw(c4548.52,3542.44) 4599.73,3593.65 ccw(c4650.94,3644.87) J1.13@4650.94,3572.44 ; J1.13@4626.94,3542.44 ccw(c4569,3542.44) 4609.97,3583.41 ccw(c4650.94,3624.38) J1.13@4650.94,3566.44
D6: J1.14 J3.14 | length 2925.3
  Top Layer w6: J3.14@3295,3440 3342,3487 ; J3.14@3305.05,3468.27 ccw(c3312.61,3489.53) 3328.57,3473.57 ccw(c3344.53,3457.61) J3.14@3323.27,3450.05 ; J3.14@3307.06,3473.92 ccw(c3316.14,3499.43) 3335.28,3480.28 ccw(c3354.43,3461.14) J3.14@3328.92,3452.06 ; J3.14@3309.07,3479.57 ccw(c3319.66,3509.34) 3342,3487 ; J3.14@3334.57,3454.07 cw(c3364.34,3464.66) 3342,3487 ; J1.14@4608.94,3442.44 ccw(c4507.55,3442.44) 4579.25,3514.14 ccw(c4650.94,3585.84) J1.14@4650.94,3484.44 ; J1.14@4614.94,3442.44 ccw(c4528.03,3442.44) 4589.49,3503.9 ccw(c4650.94,3565.35) J1.14@4650.94,3478.44 ; J1.14@4620.94,3442.44 ccw(c4548.52,3442.44) 4599.73,3493.65 ccw(c4650.94,3544.87) J1.14@4650.94,3472.44 ; J1.14@4626.94,3442.44 ccw(c4569,3442.44) 4609.97,3483.41 ccw(c4650.94,3524.38) J1.14@4650.94,3466.44 ; J1.14@4650.94,3442.44 4499,3594.39 4499,4112.37 4467.37,4144 4291,4144 3634,3487 3342,3487
D7: J1.15 J3.15 | length 2270.7
  Top Layer w6: J3.15@3520,3215 3543.63,3215 3657.63,3329 4167.22,3329 4320.78,3175.44 4833.94,3175.44 ; J3.15@3520,3221 ccw(c3520,3292.54) 3570.59,3241.95 ; J3.15@3520,3227 ccw(c3520,3313.02) 3580.83,3252.2 ; J3.15@3520,3233 ccw(c3520,3333.51) 3591.07,3262.44 ; J3.15@3520,3239 ccw(c3520,3353.99) 3601.31,3272.68 ; J3.15@3520,3245 ccw(c3520,3374.48) 3611.56,3282.92 ; J3.15@3520,3251 ccw(c3520,3394.97) 3621.8,3293.17 ; J3.15@3520,3257 ccw(c3520,3415.45) 3632.04,3303.41 ; J3.15@3556,3215 cw(c3585.86,3215) 3564.75,3236.11 ; J3.15@3562,3215 cw(c3606.34,3215) 3574.99,3246.36 ; J1.15@4838.05,3199.34 cw(c4819.1,3190.29) 4833.95,3175.44 ; J1.15@4843.46,3201.92 cw(c4827.22,3194.17) 4839.95,3181.44 cw(c4852.67,3168.72) J1.15@4860.43,3184.96 ; J1.15@4857.84,3179.54 ccw(c4848.79,3160.6) 4833.95,3175.44 ; J1.15@4875.94,3217.44 4833.94,3175.44